# EAGLE board PCB v59 (EAGLE 9.7.0)
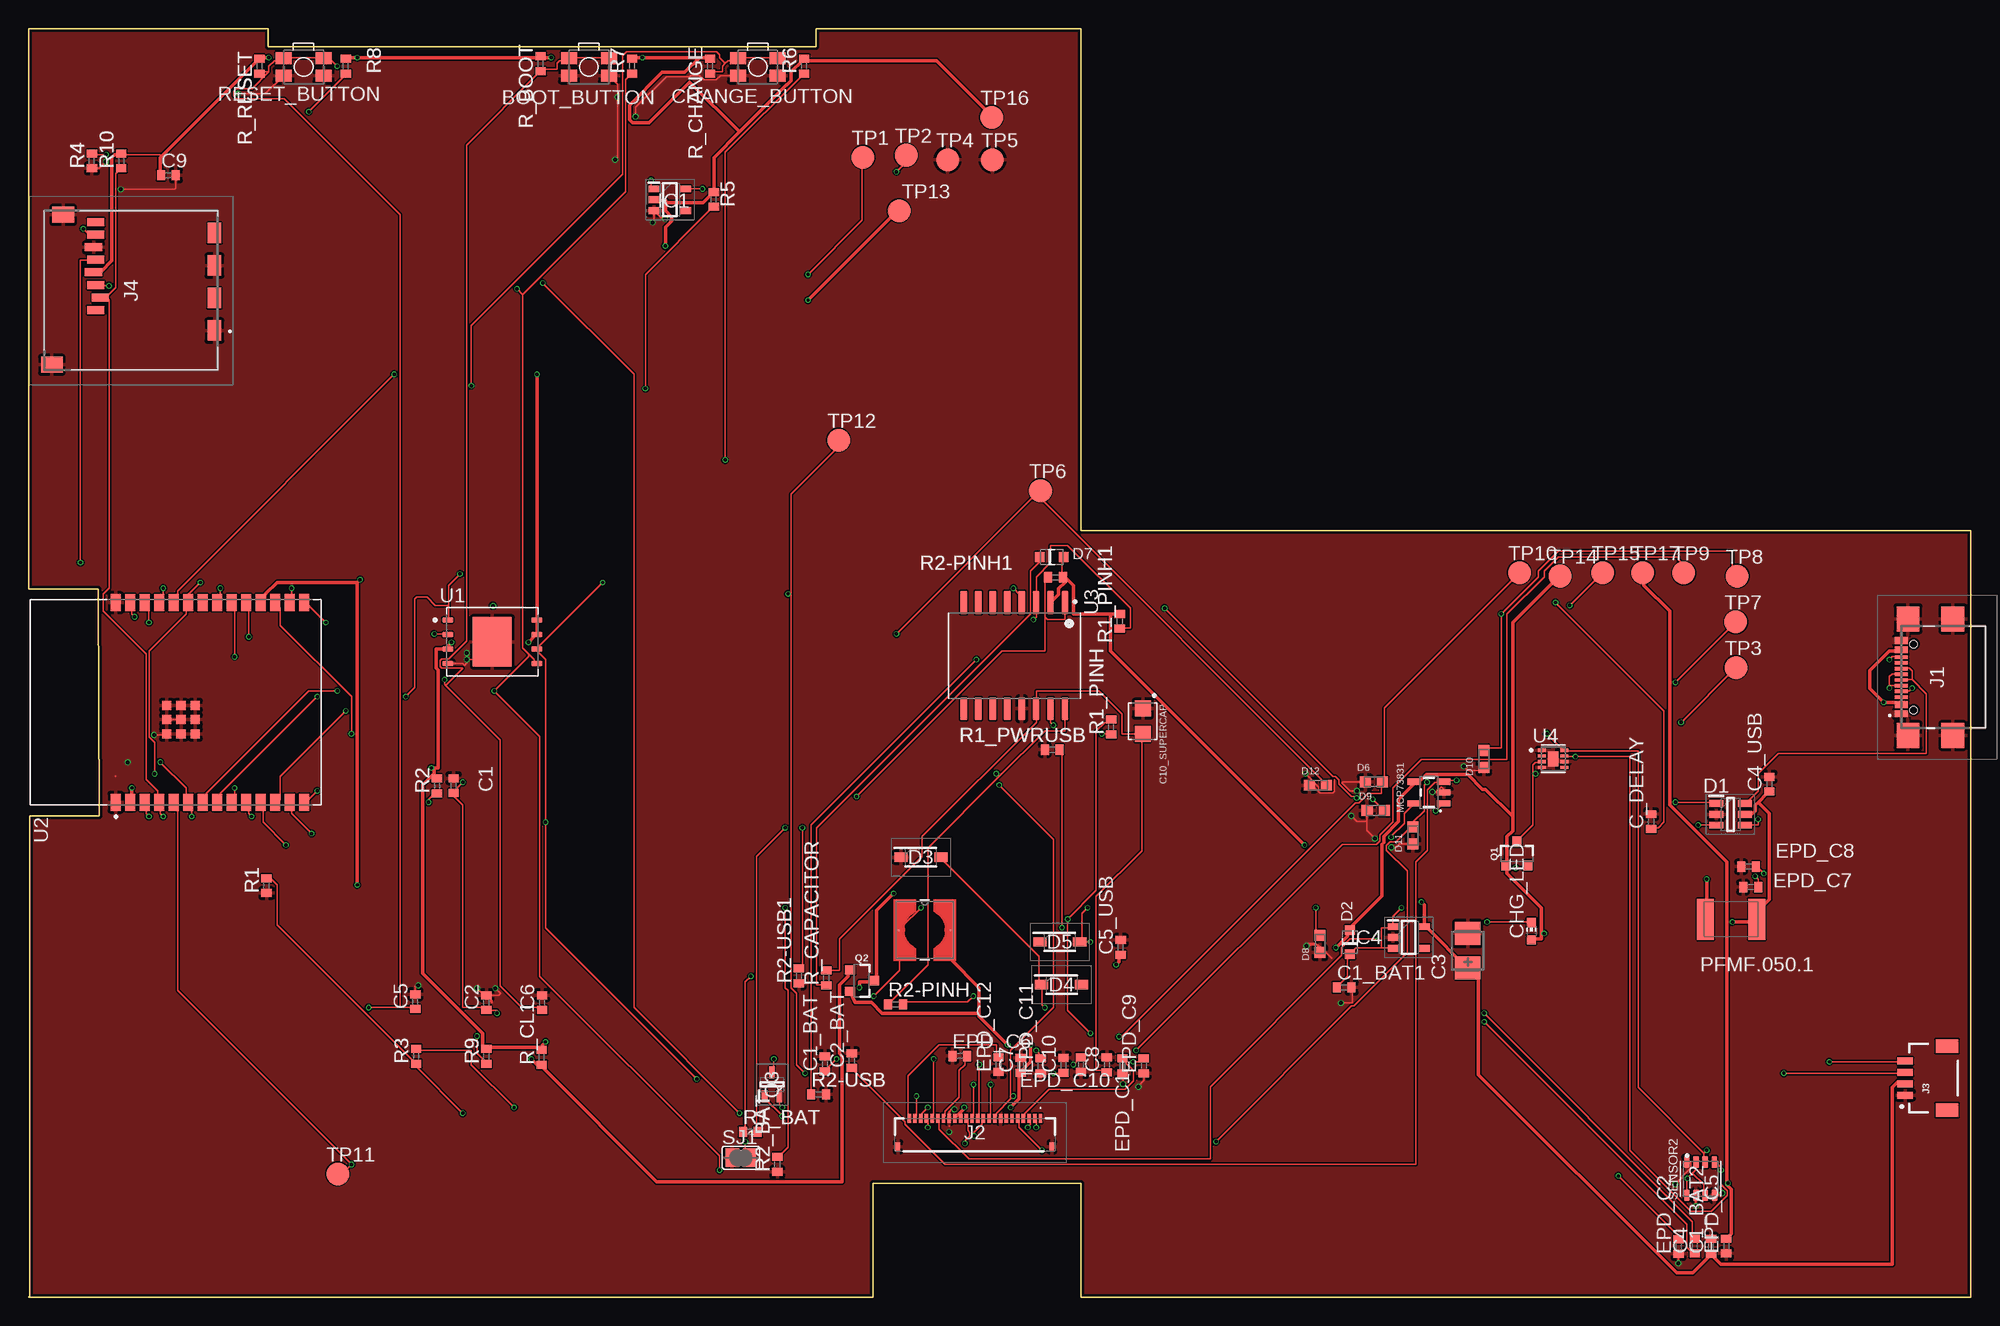
[diagram p0: board, top side]
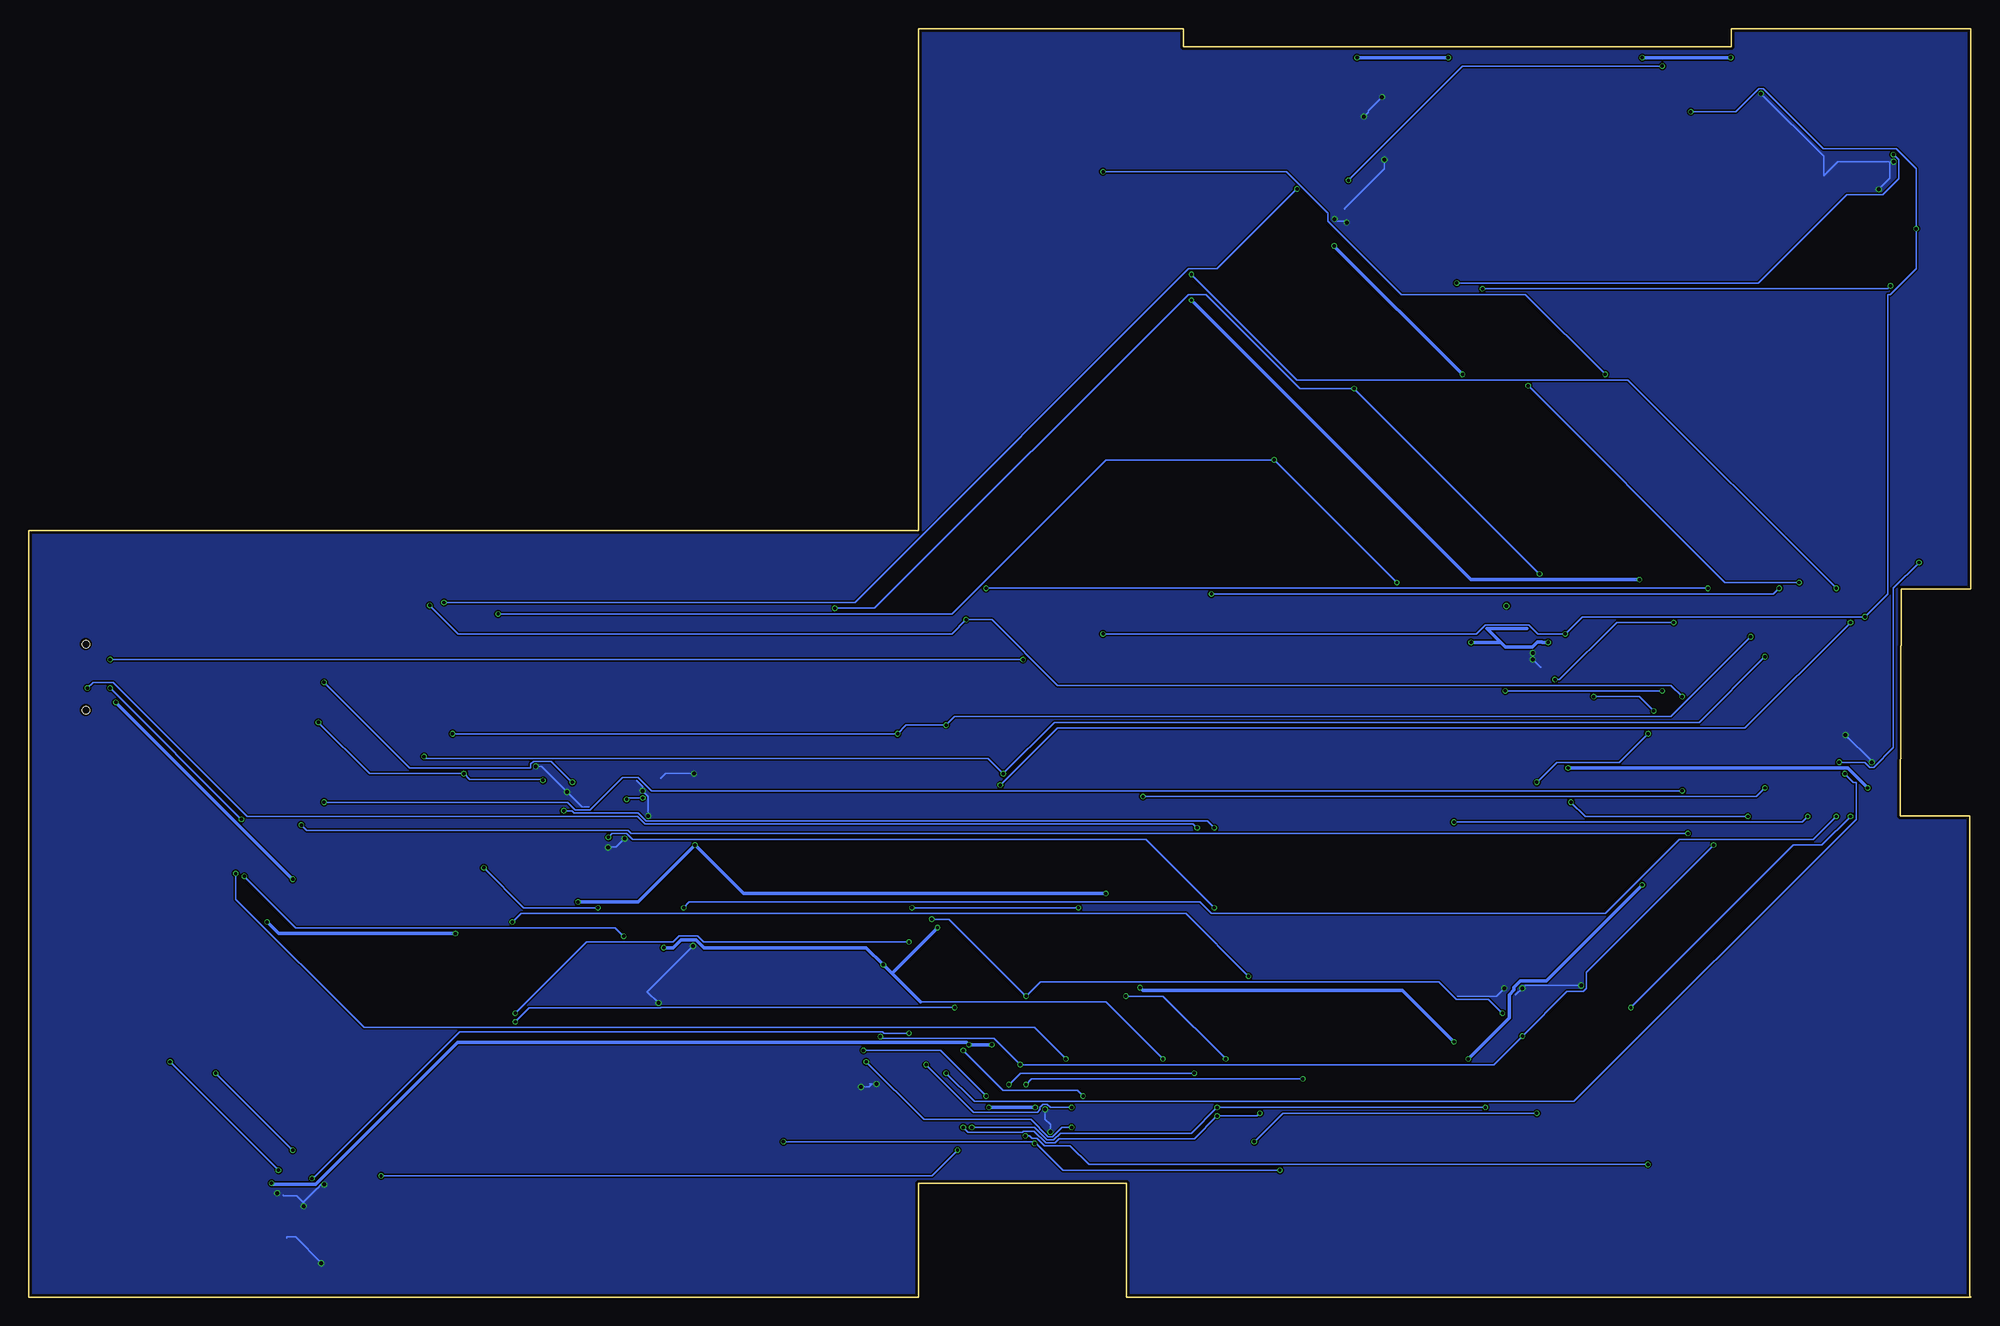
[diagram p1: board, bottom side, seen from below]

Size 170.2 x 111.2 mm. Coordinates in mm from the lower left corner, seen from the top.
Outline: 92.2,111.2 92.2,67.2 170.2,67.2 170.2,0 92.2,0 92.2,10 74,10 74,0 0,0 0.1,0.1 0.1,42.2 6.2,42.2 6.1,62.1 0,62.1 0,111.2 21,111.2 21,109.6 69,109.6 69,111.2 92.2,111.2
Copper layers (1*16): Top 0.035mm / dielectric 1.6mm / Bottom 0.035mm
Design rules "jlcpcb-2layers.dru": minimum track width 5mil, minimum drill 0.3mm, track to track 5mil, track to pad 5mil, pad to pad 5mil, via to via 5mil, smd to smd 5mil, copper to edge 0.2mm, drill to drill 6mil, minimum pad ring 10mil, minimum via ring 3mil, stop-mask expansion 4mil, vias tented up to drill 0mil, thermal gap 10mil

## Footprints (pad centres in the part's own frame; a part is rotated, then mirrored left to right if it is on the bottom)
MYBUTTON = smd 1.4 x 1.05: 1 1.75,0.75; 2 -1.75,0.75; 3 -1.75,-0.75; 4 1.75,-0.75
ESP32_WROVER_EAGLE-LTSPICE_C0402 = smd 0.7 x 0.9: 1 -0.65,0; 2 0.65,0
RCL_CT3528 = smd 2 x 2.2: + -1.5,0; - 1.5,0
EAGLE-LTSPICE_C0402 = smd 0.7 x 0.9: 1 -0.65,0; 2 0.65,0
CAPCP3225X100N = smd 1.4 x 1.4: 1 -1.1,0; 2 1.1,0
ADAFRUIT_CHIP-LED0603 = smd 0.8 x 0.8: A 0,-0.75; C 0,0.75
SOT95P280X145-6N = smd 1.2 x 0.6: 1 -1.25,0.95; 2 -1.25,0; 3 -1.25,-0.95; 4 1.25,-0.95; 5 1.25,0; 6 1.25,0.95
ESP32_WROVER_AVX---SD0805S020S1R0_AVX_SD0805S020S1R0_0 = smd 0.8 x 0.9: 1 -1.05,0; 2 1.05,0
SOD3716X135N = smd 1.15 x 0.8: 1 -1.75,0; 2 1.75,0
DIOC1608X36N = smd 0.97 x 0.94: 1 -0.75,0; 2 0.75,0
SOT95P280X125-5N = smd 0.9 x 0.6: 1 -1.4,0.95; 2 -1.4,0; 3 -1.4,-0.95; 4 1.4,-0.95; 5 1.4,0.95
SOT95P280X120-5N = smd 0.9 x 0.6: 1 -1.4,0.95; 2 -1.4,0; 3 -1.4,-0.95; 4 1.4,-0.95; 5 1.4,0.95
SAMACSYS_PARTS_USB4110GFA = smd 0.3 x 1.15: A1 -3.35,3.678; A4 -2.55,3.678; A5 -1.25,3.678; A6 -0.25,3.678; A7 0.25,3.678; A8 1.25,3.678; A9 2.55,3.678; A12 3.35,3.678; B1 3.05,3.678; B4 2.25,3.678; B5 1.75,3.678; B6 0.75,3.678; B7 -0.75,3.678; B8 -1.75,3.678; B9 -2.25,3.678; B12 -3.05,3.678 | smd 2.18 x 2: MP1 -5.11,-0.827; MP2 5.11,-0.827; MP3 -5.11,3.103; MP4 5.11,3.103 | hole 0.65: -2.89,2.603; 2.89,2.603
FH34SRJ24S05SH99 = smd 0.3 x 0.8: 1 5.75,1.45; 2 5.25,1.45; 3 4.75,1.45; 4 4.25,1.45; 5 3.75,1.45; 6 3.25,1.45; 7 2.75,1.45; 8 2.25,1.45; 9 1.75,1.45; 10 1.25,1.45; 11 0.75,1.45; 12 0.25,1.45; 13 -0.25,1.45; 14 -0.75,1.45; 15 -1.25,1.45; 16 -1.75,1.45; 17 -2.25,1.45; 18 -2.75,1.45; 19 -3.25,1.45; 20 -3.75,1.45; 21 -4.25,1.45; 22 -4.75,1.45; 23 -5.25,1.45; 24 -5.75,1.45 | smd 0.4 x 0.8: MP1 6.75,-1.05; MP2 -6.75,-1.05
JST04_1MM_RA = smd 0.6 x 1.35: 1 -1.5,0; 2 -0.5,0; 3 0.5,0; 4 1.5,0 | smd 1.2 x 2: NC1 2.8,-3.675; NC2 -2.8,-3.675
112ATAARR03ATTEND = smd 1.8 x 1.2: G1 10.6,10.4; G2 4.9,10.4; S1 7.75,10.4; S2 2.05,10.4 | smd 1.4 x 1.9: G3 13.6,-3.85; G4 0.45,-2.85 | smd 0.7 x 1.5: P1 8.8,0; P2 7.7,0.4; P3 6.6,0; P4 5.5,-0.2; P5 4.4,0; P6 3.3,-0.2; P7 2.2,0; P8 1.1,0
IND_4828-WE-TPC_WRE = smd 0.127 x 0.127: 1 -2.286,0; 2 2.286,0
ESP32_WROVER_SPARKFUN-IC-POWER_SOT23-5 = smd 0.55 x 1.2: 1 -0.95,-1.3; 2 0,-1.3; 3 0.95,-1.3; 4 0.95,1.3; 5 -0.95,1.3
ESP32C6_VARISTOR_CT/CN1812 = smd 1.5 x 3.6: 1 -2.25,0; 2 2.25,0
ESP32_WROVER_SPARKFUN-DISCRETESEMI_SOT23-3 = smd 0.8 x 0.9: 1 -0.95,-1; 2 0.95,-1; 3 0,1.1
SOT65P210X110-3N = smd 1.05 x 0.5: 1 -1.05,0.65; 2 -1.05,-0.65; 3 1.05,0
ESP32_WROVER_EAGLE-LTSPICE_R0402 = smd 0.7 x 0.9: 1 -0.65,0; 2 0.65,0
ESP32_WROVER_BME680_PSON80P300X300X100-8N = smd 1.016 x 0.5: 1 1.458,1.2; 2 1.458,0.4; 3 1.458,-0.4; 4 1.458,-1.2; 5 -1.458,-1.22; 6 -1.458,-0.4; 7 -1.458,0.4; 8 -1.458,1.2
SJ = smd 1.168 x 1.6: 1 -0.762,0; 2 0.762,0
TP20R = smd 2 x 2: TP 0,0
SON127P600X800X80-9N = smd 0.94 x 0.44: 1 -3.895,1.905; 2 -3.895,0.635; 3 -3.895,-0.635; 4 -3.895,-1.905; 5 3.895,-1.905; 6 3.895,-0.635; 7 3.895,0.635; 8 3.895,1.905 | smd 3.4 x 4.3: 9 0,0
XCVR_ESP32-C6-WROOM-1-N8 = smd 1.5 x 0.9: 1 -8.75,5.26; 2 -8.75,3.99; 3 -8.75,2.72; 4 -8.75,1.45; 5 -8.75,0.18; 6 -8.75,-1.09; 7 -8.75,-2.36; 8 -8.75,-3.63; 9 -8.75,-4.9; 10 -8.75,-6.17; 11 -8.75,-7.44; 12 -8.75,-8.71; 13 -8.75,-9.98; 14 -8.75,-11.25; 15 8.75,-11.25; 16 8.75,-9.98; 17 8.75,-8.71; 18 8.75,-7.44; 19 8.75,-6.17; 20 8.75,-4.9; 21 8.75,-3.63; 22 8.75,-2.36; 23 8.75,-1.09; 24 8.75,0.18; 25 8.75,1.45; 26 8.75,2.72; 27 8.75,3.99; 28 8.75,5.26 | smd 0.8 x 0.8: 29_1 -2.755,0.79; 29_2 -1.505,0.79; 29_3 -0.255,0.79; 29_4 -2.755,-0.46; 29_5 -1.505,-0.46; 29_6 -0.255,-0.46; 29_7 -2.755,-1.71; 29_8 -1.505,-1.71; 29_9 -0.255,-1.71
SOIC127P1032X265-16N = smd 2.05 x 0.59: 1 -4.655,4.445; 2 -4.655,3.175; 3 -4.655,1.905; 4 -4.655,0.635; 5 -4.655,-0.635; 6 -4.655,-1.905; 7 -4.655,-3.175; 8 -4.655,-4.445; 9 4.655,-4.445; 10 4.655,-3.175; 11 4.655,-1.905; 12 4.655,-0.635; 13 4.655,0.635; 14 4.655,1.905; 15 4.655,3.175; 16 4.655,4.445
SON50P200X200X80-9N = smd 0.76 x 0.27: 1 -0.985,0.75; 2 -0.985,0.25; 3 -0.985,-0.25; 4 -0.985,-0.75; 5 0.985,-0.75; 6 0.985,-0.25; 7 0.985,0.25; 8 0.985,0.75 | smd 0.9 x 1.3: 9 0,0

## Placement (x,y rotation side)
BOOT_BUTTON  [MYBUTTON]  49.1,107.83 180 top
C1  100nF  [ESP32_WROVER_EAGLE-LTSPICE_C0402]  37.24,44.84 90 top
C1_BAT  4.7uF  [ESP32_WROVER_EAGLE-LTSPICE_C0402]  69.78,20.46 90 top
C1_BAT1  4.7uF  [ESP32_WROVER_EAGLE-LTSPICE_C0402]  115.28,27.18 0 top
C1_BAT2  4.7uF  [ESP32_WROVER_EAGLE-LTSPICE_C0402]  147.42,4.48 90 top
C2  100nF  [ESP32_WROVER_EAGLE-LTSPICE_C0402]  40.12,25.84 90 top
C2_BAT  4.7uF  [ESP32_WROVER_EAGLE-LTSPICE_C0402]  72.14,20.76 90 top
C3  100uF TANT  [RCL_CT3528]  126.1,30.39 90 top
C4  4.7uF/25V  [ESP32_WROVER_EAGLE-LTSPICE_C0402]  146.01,4.5 90 top
C4_USB  100nF  [EAGLE-LTSPICE_C0402]  152.53,44.98 90 top
C5  1uF  [ESP32_WROVER_EAGLE-LTSPICE_C0402]  33.89,25.92 90 top
C5_USB  4.7uF  [EAGLE-LTSPICE_C0402]  95.69,30.68 90 top
C6  100nF  [ESP32_WROVER_EAGLE-LTSPICE_C0402]  45,25.84 90 top
C7  10uF  [ESP32_WROVER_EAGLE-LTSPICE_C0402]  86.94,20.34 90 top
C8  100nF  [ESP32_WROVER_EAGLE-LTSPICE_C0402]  94.48,20.39 90 top
C9  100nF  [EAGLE-LTSPICE_C0402]  12.26,98.34 0 top
C10  100nF  [ESP32_WROVER_EAGLE-LTSPICE_C0402]  90.69,20.34 90 top
C10_SUPERCAP  CPH3225A  [CAPCP3225X100N]  97.64,50.5 270 top
C_DELAY  100nF  [ESP32_WROVER_EAGLE-LTSPICE_C0402]  142.17,41.7 90 top
CHANGE_BUTTON  [MYBUTTON]  63.9,107.83 180 top
CHG_LED  [ADAFRUIT_CHIP-LED0603]  131.68,32.1 0 top
D1  USBLC6-2SC6Y  [SOT95P280X145-6N]  149.13,42.33 0 top
D2  ESP32_WROVER_AVX---SD0805S020S1R0_AVX_SD0805S020S1R0_0_0AVX_SD0805S020S1R0_0_0  [ESP32_WROVER_AVX---SD0805S020S1R0_AVX_SD0805S020S1R0_0]  115.79,31.14 90 top
D3  MBR0530  [SOD3716X135N]  78.19,38.58 0 top
D4  MBR0530  [SOD3716X135N]  90.52,27.41 0 top
D5  MBR0530  [SOD3716X135N]  90.36,31.16 0 top
D6  PGB1010603MR  [DIOC1608X36N]  117.88,45.18 0 top
D7  ESP32_WROVER_AVX---SD0805S020S1R0_AVX_SD0805S020S1R0_0_0AVX_SD0805S020S1R0_0_0  [ESP32_WROVER_AVX---SD0805S020S1R0_AVX_SD0805S020S1R0_0]  89.66,64.89 0 top
D8  PGB1010603MR  [DIOC1608X36N]  113.16,30.98 90 top
D9  PGB1010603MR  [DIOC1608X36N]  118.04,42.68 0 top
D10  PGB1010603MR  [DIOC1608X36N]  127.52,47.18 90 top
D11  PGB1010603MR  [DIOC1608X36N]  121.3,40.48 90 top
D12  PGB1010603MR  [DIOC1608X36N]  112.98,44.88 0 top
EPD_C1  1uF/50V  [ESP32_WROVER_EAGLE-LTSPICE_C0402]  95.85,20.31 90 top
EPD_C2  1uF/50V  [ESP32_WROVER_EAGLE-LTSPICE_C0402]  144.58,4.46 90 top
EPD_C5  0.1uF/50V  [ESP32_WROVER_EAGLE-LTSPICE_C0402]  148.75,4.5 90 top
EPD_C6  1uF/50V  [ESP32_WROVER_EAGLE-LTSPICE_C0402]  81.59,21.16 0 top
EPD_C7  1uF/50V  [ESP32_WROVER_EAGLE-LTSPICE_C0402]  150.9,35.96 0 top
EPD_C8  1uF/50V  [ESP32_WROVER_EAGLE-LTSPICE_C0402]  150.71,37.76 0 top
EPD_C9  1uF/50V  [ESP32_WROVER_EAGLE-LTSPICE_C0402]  97.72,20.31 90 top
EPD_C10  1uF/50V  [ESP32_WROVER_EAGLE-LTSPICE_C0402]  92.21,20.4 90 top
EPD_C11  1uF/50V  [ESP32_WROVER_EAGLE-LTSPICE_C0402]  88.69,20.29 90 top
EPD_C12  1uF/50V  [ESP32_WROVER_EAGLE-LTSPICE_C0402]  85,20.41 90 top
IC1  BD5229G-TR  [SOT95P280X125-5N]  56.2,96.2 0 top
IC4  XC6220A331MR-G  [SOT95P280X120-5N]  120.94,31.55 0 top
J1  SAMACSYS_PARTS_USB4110-GF-A  [SAMACSYS_PARTS_USB4110GFA]  167.78,54.36 90 top
J2  FH34SRJ-24S-0.5SH_99_  [FH34SRJ24S05SH99]  82.92,14.25 0 top
J3  QWIIC_RIGHT_ANGLE  [JST04_1MM_RA]  164.43,19.22 90 top
J4  112A-TAAR-R03_ATTEND  [112ATAARR03ATTEND]  5.89,95.33 270 top
L1  744043680IND_4828-WE-TPC_WRE  [IND_4828-WE-TPC_WRE]  78.53,32.2 0 top
MCP73831  ESP32_WROVER_SPARKFUN-IC-POWER_MCP73831  [ESP32_WROVER_SPARKFUN-IC-POWER_SOT23-5]  122.7,44.25 90 top
PFMF.050.1  ESP32C6_VARISTORCN1812  [ESP32C6_VARISTOR_CT/CN1812]  149.18,33.14 0 top
Q1  20V/4.2A/52mΩ/1.4W  [ESP32_WROVER_SPARKFUN-DISCRETESEMI_SOT23-3]  130.41,38.86 0 top
Q2  20V/4.2A/52mΩ/1.4W  [ESP32_WROVER_SPARKFUN-DISCRETESEMI_SOT23-3]  72.98,27.76 270 top
Q3  SI1308EDL-T1-GE3  [SOT65P210X110-3N]  65.14,18.66 90 top
R1  [ESP32_WROVER_EAGLE-LTSPICE_R0402]  20.85,36.08 90 top
R1_BAT  200  [ESP32_WROVER_EAGLE-LTSPICE_R0402]  63.25,14.51 0 top
R1_PINH  10K  [ESP32_WROVER_EAGLE-LTSPICE_R0402]  94.86,49.98 90 top
R1_PINH1  10K  [ESP32_WROVER_EAGLE-LTSPICE_R0402]  95.61,59.25 90 top
R1_PWRUSB  100k  [ESP32_WROVER_EAGLE-LTSPICE_R0402]  89.7,48 0 top
R2  [ESP32_WROVER_EAGLE-LTSPICE_R0402]  35.79,44.83 90 top
R2-PINH  10K  [ESP32_WROVER_EAGLE-LTSPICE_R0402]  75.97,25.68 0 top
R2-PINH1  10K  [ESP32_WROVER_EAGLE-LTSPICE_R0402]  89.98,63.1 0 top
R2-USB  5k1  [ESP32_WROVER_EAGLE-LTSPICE_R0402]  69.23,17.79 0 top
R2-USB1  5k1  [ESP32_WROVER_EAGLE-LTSPICE_R0402]  67.5,28.18 90 top
R2_BAT  2K  [ESP32_WROVER_EAGLE-LTSPICE_R0402]  65.61,11.66 90 top
R3  0.47  [ESP32_WROVER_EAGLE-LTSPICE_R0402]  33.96,21.14 90 top
R4  10K  [ESP32_WROVER_EAGLE-LTSPICE_R0402]  5.55,99.59 90 top
R5  10K  [ESP32_WROVER_EAGLE-LTSPICE_R0402]  60.04,96.22 90 top
R6  10K  [ESP32_WROVER_EAGLE-LTSPICE_R0402]  67.96,107.91 90 top
R7  10K  [ESP32_WROVER_EAGLE-LTSPICE_R0402]  52.88,107.91 90 top
R8  10K  [ESP32_WROVER_EAGLE-LTSPICE_R0402]  27.8,107.91 90 top
R9  10K  [ESP32_WROVER_EAGLE-LTSPICE_R0402]  40.12,21.12 90 top
R10  10K  [ESP32_WROVER_EAGLE-LTSPICE_R0402]  8.13,99.59 90 top
R_BOOT  10K  [ESP32_WROVER_EAGLE-LTSPICE_R0402]  44.86,108.11 90 top
R_CAPACITOR  15  [ESP32_WROVER_EAGLE-LTSPICE_R0402]  69.9,28 90 top
R_CHANGE  10K  [ESP32_WROVER_EAGLE-LTSPICE_R0402]  59.72,107.9 90 top
R_CL1  10K  [ESP32_WROVER_EAGLE-LTSPICE_R0402]  44.96,21.04 90 top
R_RESET  10K  [ESP32_WROVER_EAGLE-LTSPICE_R0402]  20.24,107.9 90 top
RESET_BUTTON  [MYBUTTON]  24.1,107.83 180 top
SENSOR2  BME688  [ESP32_WROVER_BME680_PSON80P300X300X100-8N]  146.51,10.4 90 top
SJ1  [SJ]  62.42,12.25 0 top
TP1  TPTP20R  [TP20R]  73.11,99.92 0 top
TP2  TPTP20R  [TP20R]  76.89,100.1 0 top
TP3  TPTP20R  [TP20R]  149.61,55.2 0 top
TP4  TPTP20R  [TP20R]  80.53,99.7 0 top
TP5  TPTP20R  [TP20R]  84.45,99.7 0 top
TP6  TPTP20R  [TP20R]  88.67,70.7 0 top
TP7  TPTP20R  [TP20R]  149.59,59.2 0 top
TP8  TPTP20R  [TP20R]  149.71,63.2 0 top
TP9  TPTP20R  [TP20R]  145.03,63.5 0 top
TP10  TPTP20R  [TP20R]  130.64,63.52 0 top
TP11  TPTP20R  [TP20R]  27.09,10.82 0 top
TP12  TPTP20R  [TP20R]  70.99,75.12 0 top
TP13  TPTP20R  [TP20R]  76.29,95.22 0 top
TP14  TPTP20R  [TP20R]  134.19,63.22 0 top
TP15  TPTP20R  [TP20R]  137.94,63.52 0 top
TP16  TPTP20R  [TP20R]  84.39,103.42 0 top
TP17  TPTP20R  [TP20R]  141.44,63.52 0 top
U1  W25Q512JVEIQ  [SON127P600X800X80-9N]  40.63,57.46 0 top
U2  ESP32-C6-WROOM-1-N8  [XCVR_ESP32-C6-WROOM-1-N8]  12.9,52.14 90 top
U3  DS3231SN#  [SOIC127P1032X265-16N]  86.39,56.25 270 top
U4  MAX17048G+T10  [SON50P200X200X80-9N]  133.59,47.2 0 top

## Library data of the parts
BOOT_BUTTON CHANGE_BUTTON CHG_LED PFMF.050.1 RESET_BUTTON SJ1 TP1-TP17 = DeskAssistant v19 v1
C1 C1_BAT C1_BAT1 C1_BAT2 C2 C2_BAT C4 C4_USB C5 C5_USB C6-C10 C_DELAY EPD_C1 EPD_C2 EPD_C5-EPD_C12 = DeskAssistant v19 v1; SPICEMODEL: NONE; SPICEPREFIX: C
C3 = DeskAssistant v19 v1; SPICEPREFIX: C
C10_SUPERCAP = DeskAssistant v19 v1; AVAILABILITY: Not in stock; CHECK_PRICES: https://www.snapeda.com/parts/CPH3225A/Seiko+Instruments/view-part/?ref=eda; DESCRIPTION: 11 mF (EDLC) Supercapacitor 3.3 V 1210 (3225 Metric) - -; MF: Seiko Instruments; MP: CPH3225A; PACKAGE: 1210 Seiko; PRICE: None; PURCHASE-URL: https://www.snapeda.com/api/url_track_click_mouser/?unipart_id=562593&manufacturer=Seiko Instruments&part_name=CPH3225A&search_term=None; SNAPEDA_LINK: https://www.snapeda.com/parts/CPH3225A/Seiko+Instruments/view-part/?ref=snap
D1 = DeskAssistant v19 v1; AVAILABILITY: In Stock; CHECK_PRICES: https://www.snapeda.com/parts/USBLC6-2SC6Y/STMicroelectronics/view-part/?ref=eda; DESCRIPTION: 17V Clamp 5A (8/20µs) Ipp Tvs Diode Surface Mount SOT-23-6; MF: STMicroelectronics; MP: USBLC6-2SC6Y; PACKAGE: SOT-23-6 STMicroelectronics; PRICE: None; SNAPEDA_LINK: https://www.snapeda.com/parts/USBLC6-2SC6Y/STMicroelectronics/view-part/?ref=snap
D2 D7 = DeskAssistant v19 v1; CENTROID_NOT_SPECIFIED: No; DATASHEET: http://datasheets.avx.com/schottky.pdf; DIGIKEY_DESCRIPTION: DIODE SCHOTTKY 20V 1A 0805; DIGIKEY_PART_NUMBER: 478-7800-1-ND; LEAD_FREE: yes; MF: AVX; MOUSER_PART_NUMBER: 581-SD0805S020S1R0; PACKAGE: 0805 (2012 metric); PREFIX: D; ROHS: yes; TEMPERATURE_RANGE_HIGH: +125°C; TEMPERATURE_RANGE_LOW: -55°C
D3-D5 = DeskAssistant v19 v1; AVAILABILITY: In Stock; CHECK_PRICES: https://www.snapeda.com/parts/MBR0530/Onsemi/view-part/?ref=eda; DESCRIPTION: Diode Schottky 30 V 500mA Surface Mount SOD-123; MF: ON Semiconductor; MP: MBR0530; PACKAGE: SOD-123-2 ON Semiconductor; PRICE: None; PURCHASE-URL: https://www.snapeda.com/api/url_track_click_mouser/?unipart_id=179458&manufacturer=ON Semiconductor&part_name=MBR0530&search_term=None; SNAPEDA_LINK: https://www.snapeda.com/parts/MBR0530/Onsemi/view-part/?ref=snap
D6 D8-D12 = DeskAssistant v19 v1; AVAILABILITY: In Stock; CHECK_PRICES: https://www.snapeda.com/parts/PGB1010603MR/Littelfuse/view-part/?ref=eda; DESCRIPTION: 150V (Typ) Clamp - Ipp Tvs Diode Surface Mount 0603 (1608 Metric); MF: Littelfuse Inc.; MP: PGB1010603MR; PACKAGE: 0603 Littelfuse Inc.; PRICE: None; PURCHASE-URL: https://www.snapeda.com/api/url_track_click_mouser/?unipart_id=5659453&manufacturer=Littelfuse Inc.&part_name=PGB1010603MR&search_term=None; SNAPEDA_LINK: https://www.snapeda.com/parts/PGB1010603MR/Littelfuse/view-part/?ref=snap
IC1 = DeskAssistant v19 v1; DESCRIPTION: Voltage Detector with Adjustable Delay Time: CMOS processes are utilized to develop high precision, low current consumption CMOS reset ICs that allow arbitrary setting of the delay time. The extensive lineup includes both Nch Open Drain and CMOS output types in a wide range of detection voltages (from 2.3V to 6.0V, in 0.1V steps), enabling selection of the ideal solution based on customer requirements. In addition, the entire series is of course both lead-free and RoHS-compliant.; HEIGHT: 1.25mm; MANUFACTURER_NAME: ROHM Semiconductor; MANUFACTURER_PART_NUMBER: BD5229G-TR; MOUSER_PART_NUMBER: 755-BD5229G-TR; MOUSER_PRICE-STOCK: https://www.mouser.co.uk/ProductDetail/ROHM-Semiconductor/BD5229G-TR?qs=4kLU8WoGk0vvnhrrYwdszw%3D%3D
IC4 = DeskAssistant v19 v1; DESCRIPTION: LDO Voltage Regulators; HEIGHT: 1.2mm; MANUFACTURER_NAME: Torex; MANUFACTURER_PART_NUMBER: XC6220A331MR-G; MOUSER_PART_NUMBER: 865-XC6220A331MR-G; MOUSER_PRICE-STOCK: https://www.mouser.co.uk/ProductDetail/Torex-Semiconductor/XC6220A331MR-G?qs=AsjdqWjXhJ8ZSWznL1J0gg%3D%3D
J1 = DeskAssistant v19 v1; DESCRIPTION: CONN USB 2.0 TYPE-C R/A SMT; HEIGHT: 3.26mm; MANUFACTURER_NAME: GCT (GLOBAL CONNECTOR TECHNOLOGY); MANUFACTURER_PART_NUMBER: USB4110-GF-A; MOUSER_PART_NUMBER: 640-USB4110-GF-A; MOUSER_PRICE-STOCK: https://www.mouser.co.uk/ProductDetail/GCT/USB4110-GF-A?qs=KUoIvG%2F9IlYiZvIXQjyJeA%3D%3D
J2 = DeskAssistant v19 v1; DESCRIPTION: 24 Position FFC, FPC Connector Contacts, Top and Bottom 0.020" (0.50mm) Surface Mount, Right Angle; HEIGHT: 1.1mm; MANUFACTURER_NAME: Hirose; MANUFACTURER_PART_NUMBER: FH34SRJ-24S-0.5SH(99); MOUSER_PART_NUMBER: 798-FH34SRJ24S05SH99; MOUSER_PRICE-STOCK: https://www.mouser.co.uk/ProductDetail/Hirose-Connector/FH34SRJ-24S-0.5SH99?qs=vcbW%252B4%252BSTIpKBl5ap9J8Fw%3D%3D
J3 = DeskAssistant v19 v1; PROD_ID: CONN-13694
J4 = DeskAssistant v19 v1; DESCRIPTION: Micro SD Card Socket, Push-Push Type, Top Mount, SMT, H=1.83mm, 10u; HEIGHT: 1.9mm; MANUFACTURER_NAME: ATTEND; MANUFACTURER_PART_NUMBER: 112A-TAAR-R03 ATTEND
L1 = DeskAssistant v19 v1; COPYRIGHT: Copyright (C) 2024 Ultra Librarian. All rights reserved.; MANUFACTURER_PART_NUMBER: 744043680; MFR_NAME: Wurth Electronics
MCP73831 = DeskAssistant v19 v1; PROD_ID: IC-09995
Q1 Q2 = DeskAssistant v19 v1; PROD_ID: TRAN-14388
Q3 = DeskAssistant v19 v1; AVAILABILITY: In Stock; CHECK_PRICES: https://www.snapeda.com/parts/SI1308EDL-T1-GE3/Vishay+Siliconix/view-part/?ref=eda; DESCRIPTION: Si1308EDL-T1-GE3 N-channel MOSFET Transistor, 1.5 A, 30 V, 3-Pin SC-70 | Siliconix / Vishay SI1308EDL-T1-GE3; MF: Vishay Siliconix; MP: SI1308EDL-T1-GE3; PACKAGE: SOT-323 Vishay Semiconductor; PRICE: None; PURCHASE-URL: https://www.snapeda.com/api/url_track_click_mouser/?unipart_id=274603&manufacturer=Vishay Siliconix&part_name=SI1308EDL-T1-GE3&search_term=None; SNAPEDA_LINK: https://www.snapeda.com/parts/SI1308EDL-T1-GE3/Vishay+Siliconix/view-part/?ref=snap
R1 R1_BAT R1_PINH R1_PINH1 R1_PWRUSB R2 R2-PINH R2-PINH1 R2-USB R2-USB1 R2_BAT R3-R10 R_BOOT R_CAPACITOR R_CHANGE R_CL1 R_RESET = DeskAssistant v19 v1; SPICEMODEL: NONE; SPICEPREFIX: R
SENSOR2 = DeskAssistant v19 v1; AVAILABILITY: Unavailable; DESCRIPTION: Integrated Environmental Unit; MF: Bosch Sensortec; MP: BME680; PACKAGE: LGA-8 Bosch Tools; PRICE: None
U1 = DeskAssistant v19 v1; AVAILABILITY: In Stock; CHECK_PRICES: https://www.snapeda.com/parts/W25Q512JVEIQ/Winbond+Electronics/view-part/?ref=eda; DESCRIPTION: FLASH - NOR Memory IC 512Mb (64M x 8) SPI - Quad I/O 133 MHz 8-WSON (8x6); MF: Winbond Electronics; MP: W25Q512JVEIQ; PACKAGE: Package; PRICE: None; SNAPEDA_LINK: https://www.snapeda.com/parts/W25Q512JVEIQ/Winbond+Electronics/view-part/?ref=snap
U2 = DeskAssistant v19 v1; AVAILABILITY: In Stock; CHECK_PRICES: https://www.snapeda.com/parts/ESP32-C6-WROOM-1-N8/Espressif+Systems/view-part/?ref=eda; DESCRIPTION: Multiprotocol Modules ESP32-C6 module, Wi-Fi 6 in 2.4 GHz band, Bluetooth 5, Zigbee 3.0 and Thread. ESP34-WROOM Compatible - ENGINEERING SAMPLE; MF: Espressif Systems; MP: ESP32-C6-WROOM-1-N8; PACKAGE: None; PRICE: None; SNAPEDA_LINK: https://www.snapeda.com/parts/ESP32-C6-WROOM-1-N8/Espressif+Systems/view-part/?ref=snap
U3 = DeskAssistant v19 v1; AVAILABILITY: In Stock; CHECK_PRICES: https://www.snapeda.com/parts/DS3231SN%23/Analog+Devices/view-part/?ref=eda; DESCRIPTION: Extremely Accurate I²C-Integrated RTC/TCXO/Crystal; MF: Analog Devices; MP: DS3231SN#; PACKAGE: SOIC-16 Maxim; PRICE: None; PURCHASE-URL: https://www.snapeda.com/api/url_track_click_mouser/?unipart_id=99048&manufacturer=Analog Devices&part_name=DS3231SN#&search_term=None; SNAPEDA_LINK: https://www.snapeda.com/parts/DS3231SN%23/Analog+Devices/view-part/?ref=snap
U4 = DeskAssistant v19 v1; AVAILABILITY: In Stock; CHECK_PRICES: https://www.snapeda.com/parts/MAX17048G+T10/Analog+Devices/view-part/?ref=eda; DESCRIPTION: 3µA 1-Cell/2-Cell Fuel Gauge with ModelGauge; MF: Analog Devices; MP: MAX17048G+T10; PACKAGE: TDFN-8 Maxim; PRICE: None; PURCHASE-URL: https://www.snapeda.com/api/url_track_click_mouser/?unipart_id=329239&manufacturer=Analog Devices&part_name=MAX17048G+T10&search_term=None; SNAPEDA_LINK: https://www.snapeda.com/parts/MAX17048G+T10/Analog+Devices/view-part/?ref=snap

## Nets
3V3: C1_BAT2.1 C3.+ C9.1 D7.2 IC1.2 IC4.5 J3.2 J4.P4 Q2.3 R1_PINH1.2 R2-PINH1.2 R2.2 R5.2 R6.2 R7.2 R8.2 R9.2 R10.2 R_BOOT.2 R_CHANGE.2 R_CL1.2 R_RESET.2 TP16.TP U1.3 U1.7 U1.8 U2.2 U3.2
32KHZ: R2-PINH1.1 U2.9 U3.1
DN: D1.4 J1.A7 J1.B7
DP: D1.6 J1.A6 J1.B6
EPD_3V3: C7.1 EPD_C5.2 J2.15 J2.16 L1.2 Q2.2 TP17.TP
EPD_3V3_C: Q2.1 R_CL1.1 TP13.TP U2.18
EPD_BUSY: J2.9 TP9.TP U2.26
EPD_CS: D6.2 J2.12 R9.1 TP10.TP U2.11
EPD_DC: J2.11 TP11.TP U2.5
EPD_RST: J2.10 TP12.TP U2.21
FLASH_CS: D9.2 R5.1 U1.1 U2.12
GDR: J2.2 Q3.1 R4.2
GND: BOOT_BUTTON.1 BOOT_BUTTON.2 C1.2 C1_BAT1.2 C1_BAT2.2 C1_BAT.2 C2.2 C2_BAT.2 C3.- C4_USB.2 C5.2 C5_USB.2 C6.2 C7.2 C8.2 C9.2 C10.2 C10_SUPERCAP.1 C_DELAY.2 CHANGE_BUTTON.1 CHANGE_BUTTON.2 D1.2 D3.1 D6.1 D8.1 D9.1 D10.1 D11.1 D12.1 EPD_C1.1 EPD_C2.1 EPD_C5.1 EPD_C6.1 EPD_C7.1 EPD_C8.1 EPD_C9.1 EPD_C10.1 EPD_C11.1 EPD_C12.1 IC1.3 IC4.2 J1.A1 J1.A12 J1.B1 J1.B12 J1.MP1 J1.MP2 J1.MP3 J1.MP4 J2.8 J2.17 J2.MP1 J2.MP2 J3.1 J4.G1 J4.G2 J4.G3 J4.G4 J4.P6 MCP73831.2 R1.1 R1_PWRUSB.1 R2-USB1.1 R2-USB.2 R2_BAT.1 R4.1 RESET_BUTTON.1 RESET_BUTTON.2 SENSOR2.1 SENSOR2.5 SENSOR2.7 SJ1.1 TP4.TP TP5.TP U1.4 U1.9 U2.1 U2.28 U2.29_1 U2.29_2 U2.29_3 U2.29_4 U2.29_5 U2.29_6 U2.29_7 U2.29_8 U2.29_9 U3.13 U4.1 U4.4 U4.6 U4.9
GPIOB: R2.1 U2.10
I2C_PW: C1.1 C2.1 R1_PINH.2 R2-PINH.2 SENSOR2.2 SENSOR2.6 SENSOR2.8 U2.17
INT_RTC: R1_PINH1.1 TP15.TP U2.8 U3.3
IO/BOOT: BOOT_BUTTON.3 BOOT_BUTTON.4 C6.1 R_BOOT.1 U2.15
IO/CHANGE: C10.1 CHANGE_BUTTON.3 CHANGE_BUTTON.4 R_CHANGE.1 U2.23
MISO: D12.2 J4.P7 R8.1 TP6.TP U1.2 U2.27
MOSI: D11.2 J2.14 J4.P3 R7.1 TP7.TP U1.5 U2.7
N$2: C1_BAT1.1 D2.1 IC4.1 IC4.3 Q1.2
N$3: J1.A5 R2-USB1.2
N$4: J1.B5 R2-USB.1
N$5: C4.1 D3.2 D4.1
N$7: EPD_C12.2 J2.24
N$8: CHG_LED.C R1_BAT.1
N$9: MCP73831.1 R1_BAT.2
N$10: MCP73831.5 R2_BAT.2
N$11: EPD_C11.2 J2.23
N$12: EPD_C10.2 J2.22
N$13: EPD_C9.2 J2.21
N$14: EPD_C8.2 J2.20
N$15: EPD_C7.2 J2.19
N$16: EPD_C6.2 J2.18
N$18: C_DELAY.1 IC1.5
N$24: EPD_C2.2 J2.5
N$25: D7.1 R_CAPACITOR.1
N$26: EPD_C1.2 J2.4
PREVGH: D5.1
PREVGL: D4.2
RESE: J2.3 Q3.2 R3.2
RESE': R1.2 R3.1 SJ1.2
RESET: C5.1 IC1.1 R_RESET.1 RESET_BUTTON.3 RESET_BUTTON.4 U2.3
RTC_RST: U2.16 U3.4
RX: TP2.TP U2.24
SCK: D10.2 J2.13 J4.P5 R6.1 TP8.TP U1.6 U2.6
SCL: J3.4 R2-PINH.1 SENSOR2.4 U2.20 U3.16 U4.7
SDA: J3.3 R1_PINH.1 SENSOR2.3 U2.19 U3.15 U4.8
SRC: C4.2 D5.2 L1.1 Q3.3
SS_SD: D8.2 J4.P2 R10.1 U2.4
TX: TP1.TP U2.25
USB_D+: D1.1 U2.14
USB_D-: D1.3 U2.13
VBAT: C2_BAT.1 MCP73831.3 Q1.3 TP3.TP U4.2 U4.3
VBUS: C1_BAT.1 C4_USB.1 C5_USB.1 CHG_LED.A D1.5 D2.2 MCP73831.4 PFMF.050.1.2 Q1.1 R1_PWRUSB.2 TP14.TP
VRTC: C8.1 C10_SUPERCAP.2 R_CAPACITOR.2 U3.14
VUSB: J1.A4 J1.A9 J1.B4 J1.B9 PFMF.050.1.1

## Tracks (layer width: path | path; a pad name or v marks a point on that pad's centre or on a via)
3V3  (via drill 0.3)
  Top 0.127: R2-PINH1.2 90.55,63.15 90.55,64.65 D7.2 | 90.8,63.15 R2-PINH1.2 | 90.8,62.65 90.8,62.9 R2-PINH1.2 | 122.55,32.4 IC4.5 122.3,32.65 | 126.05,28.9 C3.+ 126.3,28.65 | 147.55,3.65 C1_BAT2.1 147.3,3.65 | 164.3,18.9 J3.2 | 59.55,108.65 R_CHANGE.2 | 53.05,108.65 R7.2 | 54.8,96.15 IC1.2 | 67.8,108.4 R6.2 68.05,108.4 | 60.05,96.9 R5.2 | 84.3,103.65 TP16.TP | 27.8,108.65 R8.2 | 44.8,108.65 R_BOOT.2 45.05,108.65 | 11.55,99.9 11.55,100.15 8.3,100.15 R10.2 8.05,100.15 | 11.55,98.4 C9.1 | 20.05,108.4 R_RESET.2 20.3,108.65 | 5.8,89.9 J4.P4 | 40.3,21.9 R9.2 40.05,21.9 39.8,22.15 | 44.8,21.9 R_CL1.2 45.05,21.9 | 74.05,27.65 Q2.3 74.3,27.9 | 44.55,58.15 U1.7 44.3,57.9 | 44.55,59.15 U1.8 44.55,59.4 | 35.55,45.9 35.55,45.65 R2.2 | 36.98,57.33 v37.05,57.4 | 35.55,46.4 v35.3,46.4 | U2.2 9.05,43.4
  Top 0.152: U1.3 36.48,56.83
  Top 0.3: 94.8,59.9 91.55,59.9 91.55,62.4 90.8,63.15 | 94.8,59.9 R1_PINH1.2 | 126.05,28.9 122.55,32.4 | 147.55,3.65 148.3,2.9 163.3,2.9 163.3,18.4 163.8,18.9 164.3,18.9 | 126.3,28.65 127.05,27.9 127.05,19.53 144.42,2.16 145.81,2.16 147.3,3.65 | 94.8,59.9 94.8,56.65 v111.8,39.65 | v122.05,34.65 122.3,34.4 122.3,32.65 | 53.05,108.65 v53.8,108.65 58.8,108.65 | 58.8,108.65 59.55,108.65 | 54.8,96.15 55.8,96.15 55.8,95.95 | 67.8,108.4 66.8,107.4 66.8,106.62 66.47,106.28 66.43,106.28 62.3,102.15 | 62.3,102.15 60.05,99.9 60.05,96.9 | 84.3,103.65 79.55,108.4 68.05,108.4 | 44.8,108.65 v28.8,108.65 27.8,108.65 | 11.55,98.4 11.55,99.9 20.05,108.4 | 8.05,100.15 7.55,100.15 7.3,99.9 7.3,90.85 6.35,89.9 5.8,89.9 | 20.3,108.65 v21.05,108.65 | 45.05,108.65 v45.8,108.65 | 44.8,21.9 40.3,21.9 | 74.05,27.65 72.8,27.65 v72.8,27.15 | v45.3,22.4 45.05,22.15 45.05,21.9 | 44.55,59.15 44.55,58.15 | 35.55,46.4 35.55,45.9 34.55,44.9 34.55,28.4 39.8,23.15 39.8,22.15 | U1.3 35.73,56.83 35.73,55.15 35.9,54.98 35.9,46.4 v35.3,46.4 | v43.8,57.4 44.3,57.9 | 9.05,43.4 v9.05,44.65 | 44.55,59.4 v44.55,80.9 | v75.8,35.4 74.3,33.9 74.3,27.9 | 36.48,56.83 36.98,57.33 | 58.8,108.65 57.5,107.35 55.53,107.35 52.66,104.48 52.66,103.22 52.92,102.96 54.38,102.96 57.94,106.51 62.3,102.15 | v55.8,92.15 55.8,93.78 56.34,94.32 56.34,94.68 55.8,95.23 55.8,95.95 | 55.8,95.95 59.12,95.95 R5.2 | U3.2 90.26,61.6 90.26,62.11 90.8,62.65
  Bottom 0.127: 37.58,57.4 37.62,57.44
  Bottom 0.3: v122.05,34.65 116.8,34.65 v111.8,39.65 107.55,35.4 v75.8,35.4 | v21.05,108.65 v28.8,108.65 | v45.8,108.65 v53.8,108.65 | v72.8,27.15 72.55,26.9 49.8,26.9 v45.3,22.4 | v9.05,44.65 10.8,46.4 v35.3,46.4 | v44.55,80.9 v55.8,92.15 | v37.05,57.4 37.58,57.4 | 37.62,57.44 37.98,57.44 38.42,57 40.8,57 41.2,57.4 | 41.2,57.4 42.4,58.6 38.9,58.6 | 41.2,57.4 v43.8,57.4
32KHZ  (via drill 0.3)
  Top 0.127: 89.05,59.65 89.05,62.65 89.3,62.9 R2-PINH1.1 | 89.05,59.65 89.3,59.4 90.8,59.4 90.8,60.9 U3.1 | v18.05,44.65 18.05,43.65 U2.9 | v72.55,43.9 85.3,56.65 89.05,56.65 89.05,59.65
  Bottom 0.127: v18.05,44.65 18.8,43.9 v72.55,43.9
DN  (via drill 0.3)
  Top 0.127: 163.05,53.65 164.05,53.65 J1.B7 | 163.05,53.65 163.05,54.4 163.3,54.65 164.05,54.65 J1.A7 | v151.55,41.9 151.55,41.4 150.55,41.4 D1.4 | 163.05,53.65 v163.05,53.4
  Bottom 0.127: v163.05,53.4 v151.55,41.9
DP
  Top 0.127: 165.05,54.15 164.3,54.15 J1.A6 | 165.05,54.15 165.05,54.9 164.8,55.15 164.3,55.15 J1.B6 | 165.05,54.15 166.3,52.9 166.3,47.65 153.3,47.65 151.55,45.9 151.55,44.4 150.55,43.4 D1.6
EPD_3V3  (via drill 0.3)
  Top 0.127: J2.15 81.55,15.9 81.37,15.9 81.3,15.9 J2.16 | 80.8,29.65 80.8,32.15 L1.2 | 87.05,19.9 C7.1 86.8,19.65 | TP17.TP 141.55,63.4 | v148.91,10.01 148.8,9.9 148.8,9.88
  Top 0.3: 83.3,24.9 74.8,24.9 73.85,25.85 72.4,25.85 Q2.2 | 83.3,24.9 83.3,27.15 80.8,29.65 | 87.05,19.9 87.8,20.65 v87.8,22.15 | v85.8,22.15 83.3,24.65 83.3,24.9 | v86.05,16.65 86.8,17.4 86.8,19.65 | 148.8,9.9 148.8,38.15 143.8,43.15 143.8,60.15 141.55,62.4 141.55,63.4 | 148.8,9.88 149.2,9.49 149.2,5.6 EPD_C5.2 | v81.98,16.65 81.98,16.51 81.37,15.9
  Bottom 0.127: 88,22.35 v87.8,22.15 | 148.83,9.93 v148.91,10.01
  Bottom 0.3: v85.8,22.15 v87.8,22.15 | 88,22.35 132.6,22.35 145.02,9.93 148.83,9.93 | v86.05,16.65 v81.98,16.65
EPD_3V3_C  (via drill 0.3)
  Top 0.127: 20.8,61.65 20.8,61.15 20.55,60.9 U2.18 | 44.8,20.15 R_CL1.1 | 76.05,95.15 TP13.TP
  Top 0.3: R_CL1.1 45.05,20.15 55.05,10.15 71.3,10.15 71.3,21.15 71.05,21.4 71.05,27.4 71.8,28.15 71.8,28.65 Q2.1 | v28.8,36.15 28.8,62.65 | 44.8,20.15 v44.05,20.9 | v68.3,87.4 76.05,95.15 | 28.8,62.65 v29.05,62.9 | 20.8,61.65 20.8,61.67 21.78,62.65 28.8,62.65
  Bottom 0.3: v68.3,87.4 43.8,62.9 v29.05,62.9 | v44.05,20.9 40.47,24.48 40.47,26.51 40.04,26.94 40.04,27.18 39.48,27.74 37.21,27.74 v28.8,36.15
EPD_BUSY  (via drill 0.3)
  Top 0.127: 86.05,17.4 84.8,16.15 84.8,15.9 J2.9 | TP9.TP 144.8,63.65 144.8,64.4 144.55,64.65 144.55,64.9 134.05,64.9 132.8,63.65 132.8,63.15 129.55,59.9 129.55,47.15 122.05,47.15 119.55,44.65 119.55,41.68 118.41,40.53 118.41,40.03 118.08,39.71 115.11,39.71 v97.05,21.65 | v10.55,59.15 10.55,60.4 10.3,60.65 U2.26 | v85.05,44.9 89.8,40.15 89.8,25.4 86.05,21.65 86.05,17.4 | v86.3,17.65 86.05,17.4
  Bottom 0.127: v97.05,21.65 90.3,21.65 v86.3,17.65 | v10.55,59.15 19.8,49.9 80.05,49.9 v85.05,44.9
EPD_CS  (via drill 0.3)
  Top 0.127: v22.55,39.65 20.55,41.65 20.55,43.15 U2.11 | R9.1 40.05,20.65 39.3,21.4 v39.3,22.9 | v83.3,20.4 83.3,15.9 J2.12 | TP10.TP 130.55,63.4 118.8,51.65 118.8,45.4 D6.2 118.55,45.15 118.55,44.15 117.35,44.15 116.55,43.36 116.25,43.36 95.75,22.85 v95.55,22.85
  Bottom 0.127: v39.3,22.9 41.8,20.4 v83.3,20.4 85.59,22.69 95.39,22.69 v95.55,22.85 | v22.55,39.65 33.71,28.49 33.71,27.07 33.97,26.81 35.39,26.81 v39.3,22.9 | v39.3,22.9
EPD_DC  (via drill 0.3)
  Top 0.127: J2.11 83.55,15.65 83.55,15.15 82.86,14.46 v82.86,14.15 | TP11.TP 27.3,10.65 v28.3,11.65 13.05,26.9 13.05,42.9 12.8,43.15 U2.5
  Bottom 0.127: v28.3,11.65 77.3,11.65 | v82.86,14.15 82.47,14.15 82.31,13.98
  Bottom 0.152: 82.31,13.98 82.26,13.93 81.82,13.93 81.17,13.28 78.93,13.28 77.3,11.65
EPD_RST  (via drill 0.3)
  Top 0.127: v84.3,18.65 84.3,15.9 J2.10 | v68.05,19.65 67.3,20.4 67.3,26.65 66.8,27.15 66.8,61.65 | 66.8,61.65 66.8,70.4 70.8,74.4 70.8,74.9 TP12.TP | v16.8,62.15 16.8,61.15 16.55,60.9 U2.21 | 66.8,61.65 v66.55,61.65
  Bottom 0.127: v84.3,18.65 83.3,19.65 v68.05,19.65 | v16.8,62.15 17.3,61.65 v66.55,61.65
FLASH_CS  (via drill 0.3)
  Top 0.127: v54.05,79.65 54.05,89.65 59.8,95.4 R5.1 | 36.8,60.65 36.8,59.4 U1.1 | 36.8,60.65 36.8,62.4 v37.8,63.4 | v117.8,43.65 118.55,42.9 D9.2 | v27.8,51.4 22.05,45.65 22.05,43.65 21.8,43.4 U2.12 | 36.8,60.65 35.63,60.65 34.91,61.37 33.99,61.37 33.83,61.21 33.83,53.43 v33.05,52.65 | v99.55,60.4 114.28,45.67 114.53,45.67 114.83,45.36 114.83,44.99 115.92,43.9 116.25,43.9 v116.38,43.77
  Bottom 0.127: v99.55,60.4 96.05,60.4 68.55,87.9 67.05,87.9 58.8,79.65 v54.05,79.65 v37.8,63.4 | v27.8,51.4 29.05,52.65 v33.05,52.65 | v117.8,43.65 117.68,43.77 v116.38,43.77
GDR  (via drill 0.3)
  Top 0.127: v88.3,14.9 88.3,15.65 J2.2 | v66.05,15.9 64.55,17.4 Q3.1 | v6.8,100.15 5.55,100.15 R4.2 | v45.05,88.9 53.05,80.9 53.05,25.4 v62.3,16.15
  Bottom 0.127: v62.3,16.15 62.55,15.9 v66.05,15.9 68.05,13.9 79.93,13.9 80.28,13.55 81.06,13.55 82.08,14.57 83.03,14.57 83.11,14.48 87.88,14.48 v88.3,14.9 | v45.05,88.9 18.62,88.9 10.87,96.66 7.72,96.66 6.33,98.04 6.33,99.71 6.59,99.96 6.61,99.96 v6.8,100.15
GND  (via drill 0.35)
  Top 0.127: U2.29_5 13.3,50.65 12.3,50.65 U2.29_2
  Top 0.152: 80.67,15.03 80.7,15 | D8.1 113,30.39 113,30.8 112.76,31.04 112.04,31.04 111.9,30.9 | RESET_BUTTON.1 20.8,105.53 20.8,105.5 v18.4,105.5 | C9.2 12.91,97.21 12.8,97.1 v8.09,97.1 | SENSOR2.7 v146.11,8.01 v146.1,8 | SENSOR2.1 145.6,11.86 145.66,11.8 145.66,11.34 144.92,10.61 144.92,10.52 v144.3,9.9 | C1_BAT1.2 116,27.11 116,25.8 v115,25.8 | C5.2 33.89,27.29 34.05,27.45 v34.15,27.35 | v40.9,27.1 41.35,26.65 41.19,26.49 C2.2 40.6,26.01 40.6,25.8 v39.3,27.1 | U1.9 39.07,55.9 v38.4,55.9 38.4,55.6 38.2,55.4 38.05,55.56 U1.4 | CHANGE_BUTTON.1 60.64,107.08 60.25,106.7 59.19,106.7 58.8,107.08 58.01,107.08 57.92,107 55.9,107 53.19,104.29 v53.19,103.49 | v51.4,99.7 51.6,99.9 v51.6,105.2 51.6,106.33 BOOT_BUTTON.2 | 117.29,41.79 D9.1 | 117.29,41.79 117.2,41.7 116.4,41.7 v115.9,42.2 | D12.1 112.49,44.88 113.04,44.33 | 114.42,45.4 114.42,44.33 114.3,44.21 113.16,44.21 113.04,44.33 | 113.04,44.33 113.04,44.76 v111.9,45.9 | D6.1 115.18,45.18 115.1,45.1 115.8,44.4 v116.4,44.4 | MCP73831.2 124,44.52 123.8,44.72 123.38,44.3 v123,44.3 | D11.1 120.13,39.73 119.9,39.5 119.49,39.5 v119.42,39.43 | 117.29,41.79 117.29,40.91 117.96,40.24 v117.96,40.21 | v80.67,14.5 80.67,14.43 80.8,14.3 | 114.2,29.7 113,30.9 111.9,30.9 | SENSOR2.5 147.79,9 148.28,9 v148.41,9.14 | v54.7,94.2 54.8,94.3 IC1.3 55.49,94.56 55.72,94.56 v55.77,94.51 | 7.64,45.66 7.6,45.7 | U2.29_1 12.03,49.3 v11,49.3 | EPD_C1.1 95.9,19.61 v95.9,18.7 | EPD_C9.1 97.72,19.02 97.2,18.5 v97.25,18.45 | J2.17 80.67,16.27 80.7,16.3 80.7,15.73 J2.17 | J2.17 80.67,16.29 80.69,16.29 80.88,16.48 v81.13,16.48 | R4.1 6.19,98.94 v6.78,99.52 | EPD_C2.1 144.58,3.01 v144.56,2.99
  Top 0.152: 111.9,30.9 111.96,30.84 v111.96,30.81 | v125.75,46.55 126.13,46.17 127.26,46.17 D10.1
  Bottom 0.152: 7.1,99.52 11.68,99.52 12.9,98.3 12.9,100 v18.4,105.5 | v146.1,8 145.95,8.15 146.15,8.35 | 146.15,8.35 146.7,8.9 147.9,8.9 147.9,9 | 147.6,5.2 147.6,5.3 146.8,5.3 144.56,3.06 v144.56,2.99 | v115,25.8 116,26.8 111.99,30.81 v111.96,30.81 | v34.15,27.35 39.05,27.35 v39.3,27.1 39.9,26.5 | v40.9,27.1 41.6,26.4 45,26.4 | v51.4,99.7 51.4,98.9 54.9,95.4 54.85,95.35 | v38.4,55.9 37.7,55.2 | v51.6,105.2 52.8,104 52.8,103.87 v53.19,103.49 | v115.9,42.2 115.9,43.9 v116.4,44.4 116.4,44.8 116.9,45.3 | v111.9,45.9 114.4,45.9 114.8,45.5 | v125.75,46.55 125.25,46.55 v123,44.3 121.7,43 121.1,43 | v54.7,94.2 54.8,94.3 55.55,94.3 v55.77,94.51 | v11,49.3 8.7,47 v8.7,46.9 | v95.9,18.7 96.3,18.7 | 96.3,18.7 96.5,18.7 | v97.25,18.45 96.55,18.45 96.3,18.7 | v81.13,16.48 81.13,15.63 80.67,15.17 v80.67,14.5 | v8.09,97.1 7.1,98.09 7.1,99.52 | 7.1,99.52 v6.78,99.52 | v117.96,40.21 117.99,40.21 118.73,39.47 119.39,39.47 v119.42,39.43 | v144.3,9.9 144.55,9.9 144.87,9.58 144.92,9.58 146.15,8.35 | 148.6,9.1 148.56,9.14 v148.41,9.14
  other vias: 38.4,56.47
  pour Top: 73.86,10.17 73.88,10.18 92.32,10.18 92.34,10.17 92.36,10.14 92.38,10.12 92.38,0.18 170.02,0.18 170.02,67.02 92.08,67.02 92.06,67.04 92.04,67.06 92.02,67.09 92.02,111.02 69.18,111.02 69.18,109.49 69.16,109.46 69.14,109.44 69.12,109.42 20.88,109.42 20.86,109.44 20.84,109.46 20.82,109.49 20.82,111.02 0.18,111.02 0.18,62.28 6.32,62.28 6.34,62.27 6.36,62.24 6.38,62.22 6.38,42.09 6.36,42.06 6.34,42.04 6.32,42.02 0.28,42.02 0.28,0.18 73.82,0.18 73.82,10.12 73.84,10.14
  pour Bottom: 73.86,10.17 73.88,10.18 92.32,10.18 92.34,10.17 92.36,10.14 92.38,10.12 92.38,0.18 170.02,0.18 170.02,67.02 92.08,67.02 92.06,67.04 92.04,67.06 92.02,67.09 92.02,111.02 69.18,111.02 69.18,109.49 69.16,109.46 69.14,109.44 69.12,109.42 20.88,109.42 20.86,109.44 20.84,109.46 20.82,109.49 20.82,111.02 0.18,111.02 0.18,62.28 6.32,62.28 6.34,62.27 6.36,62.24 6.38,62.22 6.38,42.09 6.36,42.06 6.34,42.04 6.32,42.02 0.28,42.02 0.28,0.18 73.82,0.18 73.82,10.12 73.84,10.14
  pour Top: 69.18,109.37 69.13,109.35 20.87,109.35 20.82,109.37 20.77,109.42 20.75,109.47 20.75,110.85 0.25,110.85 0.25,67.25 91.95,67.25 91.95,110.95 69.25,110.95 69.25,109.47 69.23,109.42
  pour Top: 73.82,10.23 73.87,10.25 92.33,10.25 92.38,10.23 92.43,10.19 92.45,10.13 92.45,0.25 169.95,0.25 169.95,66.95 0.25,66.95 0.25,62.35 6.33,62.35 6.38,62.33 6.43,62.29 6.45,62.23 6.45,42.07 6.43,42.02 6.38,41.97 6.33,41.95 0.35,41.95 0.35,0.25 73.75,0.25 73.75,10.13 73.77,10.19
  pour Bottom: 69.28,109.37 69.23,109.35 20.87,109.35 20.82,109.37 20.77,109.42 20.75,109.47 20.75,110.95 0.25,110.95 0.25,67.25 91.95,67.25 91.95,110.95 69.25,110.95 69.25,109.64 69.28,109.63 69.33,109.59 69.35,109.53 69.35,109.47 69.33,109.42
  pour Bottom: 73.82,10.23 73.87,10.25 92.33,10.25 92.38,10.23 92.43,10.19 92.45,10.13 92.45,0.25 169.95,0.25 169.95,66.95 0.25,66.95 0.25,62.35 6.33,62.35 6.38,62.33 6.43,62.29 6.45,62.23 6.45,42.07 6.43,42.02 6.38,41.97 6.33,41.95 0.35,41.95 0.35,0.25 73.75,0.25 73.75,10.13 73.77,10.19
GPIOB  (via drill 0.3)
  Top 0.127: v19.55,42.15 19.3,42.4 19.3,43.15 U2.10 | R2.1 35.55,44.15 35.05,43.65 v35.05,43.4
  Bottom 0.127: v19.55,42.15 33.8,42.15 v35.05,43.4
I2C_PW  (via drill 0.3)
  Top 0.127: v38.05,45.15 37.3,44.4 C1.1 37.3,44.15 37.3,43.9 38.05,43.15 38.05,25.4 40.05,25.4 C2.1 40.3,25.15 41.05,25.15 v41.05,24.9 | U2.17 21.8,60.65 22.05,60.4 22.05,58.9 28.3,52.65 v28.3,49.4 | 145.3,10.4 145.3,9.15 SENSOR2.8 | 145.8,10.9 146.05,11.15 146.05,11.65 SENSOR2.2 | 145.8,10.9 145.3,10.4 | 145.8,10.9 146.8,9.9 146.8,9.15 SENSOR2.6 | R2-PINH.2 76.8,25.9 82.3,25.9 v82.8,26.4 | R1_PINH.2 94.8,50.4 94.3,50.4 93.55,49.65 93.55,35.65 v91.05,33.15 91.05,25.15 v93.05,23.15 | 145.3,10.4 145.32,10.4 v145.35,10.43
  Bottom 0.127: v38.05,45.15 36.3,46.9 30.8,46.9 v28.3,49.4 | v82.8,26.4 89.55,33.15 v91.05,33.15 | v82.8,26.4 81.55,27.65 46.63,27.65 45.11,26.13 42.28,26.13 v41.05,24.9 | v82.8,26.4 | v93.05,23.15 95.26,23.15 95.38,23.27 132.43,23.27 145.27,10.43 v145.35,10.43
INT_RTC  (via drill 0.3)
  Top 0.127: R1_PINH1.1 95.8,58.65 96.55,58.65 96.55,60.4 91.05,65.9 89.55,65.9 89.55,64.4 88.3,63.15 88.3,61.15 U3.3 88.3,59.65 v88.05,59.4 | v25.3,52.65 16.8,44.15 16.8,43.65 16.55,43.4 U2.8 | v135.05,60.65 137.8,63.4 TP15.TP
  Bottom 0.127: v25.3,52.65 26.3,53.65 80.05,53.65 85.8,59.4 v88.05,59.4 89.3,58.15 132.55,58.15 v135.05,60.65
IO/BOOT  (via drill 0.3)
  Top 0.127: BOOT_BUTTON.3 50.8,108.65 47.55,108.65 BOOT_BUTTON.4 47.3,108.4 46.55,108.4 46.3,108.15 46.3,107.65 45.05,107.65 R_BOOT.1 44.8,107.4 38.38,100.98 38.38,57.55 36.8,55.97 36.22,55.97 36.07,55.82 36.07,55.29 36.22,55.15 38.02,55.15 38.03,55.13 36.55,53.65 | v26.05,59.15 24.3,60.9 U2.15 | C6.1 44.8,25.4 43.22,25.4 41.34,27.28 41.34,48.86 36.55,53.65 | 36.55,53.65 36.45,53.75 v36.45,54.15
  Bottom 0.127: v26.05,59.15 31.05,59.15 36.05,54.15 v36.45,54.15
IO/CHANGE  (via drill 0.3)
  Top 0.127: 61.05,108.15 61.3,108.4 62.05,108.4 CHANGE_BUTTON.4 62.3,108.65 65.55,108.65 CHANGE_BUTTON.3 | 61.05,108.15 60.8,107.9 60.8,107.4 59.8,107.4 R_CHANGE.1 | v89.8,19.65 90.55,19.65 C10.1 | 61.05,108.15 60.55,108.65 60.55,108.9 60.3,109.15 52.4,109.15 52.06,108.81 52.06,98.41 38.8,85.15 v38.8,79.9 | v15.05,62.65 14.05,61.65 14.05,60.9 U2.23 13.8,60.65 13.8,59.9 10.56,56.66 10.56,49.12 11.05,48.63 v11.05,45.9
  Bottom 0.127: v38.8,79.9 21.55,62.65 v15.05,62.65 | v89.8,19.65 87.32,17.17 34.78,17.17 10.05,41.9 10.05,45.15 10.3,45.15 v11.05,45.9
MISO  (via drill 0.3)
  Top 0.127: D12.2 113.55,44.9 113.3,45.15 113.3,45.4 88.8,69.9 88.8,70.65 TP6.TP 88.55,70.65 v76.05,58.15 | v35.55,58.15 36.55,58.15 U1.2 | v9.3,59.65 9.05,59.9 9.05,60.65 U2.27 | v24.55,103.9 27.8,107.15 R8.1 | v4.8,93.65 5.3,93.15 5.8,93.15 J4.P7
  Bottom 0.127: v24.55,103.9 20.62,103.9 18.58,105.94 18.22,105.94 12.93,100.65 6.55,100.65 4.8,98.9 v4.8,93.65 4.8,90.15 7.05,87.9 7.3,87.9 7.3,61.65 v9.3,59.65 34.05,59.65 v35.55,58.15 37.97,58.15 38.76,58.94 42.54,58.94 43.33,58.15 v76.05,58.15
MOSI  (via drill 0.3)
  Top 0.127: 43.3,87.9 43.3,56.9 43.8,56.4 | 43.8,56.4 44.3,55.9 44.3,55.65 U1.5 | v27.05,53.15 24.55,53.15 15.55,44.15 15.55,43.65 15.3,43.4 U2.7 | 43.8,56.4 43.8,56.15 v40.8,53.15 44.8,49.15 44.8,28.15 60.55,12.4 v60.55,11.15 | v7.05,88.65 6.05,88.65 J4.P3 | 43.3,87.9 v42.8,88.4 | J2.14 82.3,15.65 82.3,14.63 82.44,14.48 82.44,14.12 82.05,13.73 v82.05,13.5 | v122.55,45.15 122.3,44.9 122.3,42.65 121.3,41.65 121.3,41.4 | 121.3,41.4 D11.2 | v104.05,13.65 115.93,25.53 116.11,25.53 120.8,30.22 120.8,37.38 118.98,39.2 118.98,39.61 119.27,39.91 119.81,39.91 121.3,41.4 | 43.3,87.9 52.32,96.92 52.32,106.7 R7.1 | TP7.TP v144.3,53.9
  Bottom 0.127: v40.8,53.15 v27.05,53.15 | v7.05,88.65 7.3,88.4 v42.8,88.4 | 82.05,13.65 v104.05,13.65 | v60.55,11.15 79.55,11.15 82.05,13.65 | v122.55,45.15 124.39,46.99 125.93,46.99 126.19,46.73 126.19,46.43 126.22,46.4 136.8,46.4 v144.3,53.9 | v82.05,13.5 82.05,13.65
N$2  (via drill 0.3)
  Top 0.127: C1_BAT1.1 114.8,27.4 115.55,28.15 115.55,29.9 D2.1 115.8,30.15 116.3,30.65 118.55,30.65 | 118.55,30.65 119.3,30.65 IC4.3 | 118.55,30.65 118.55,32.4 119.3,32.4 IC4.1 119.55,32.65 119.55,33.4 v120.3,34.15 | v130.3,37.65 131.3,37.65 Q1.2
  Bottom 0.127: v130.3,37.65 126.8,34.15 v120.3,34.15
N$3  (via drill 0.3)
  Top 0.127: v67.8,41.15 67.8,29.15 67.55,28.9 R2-USB1.2 | v165.05,53.4 164.8,53.15 164.3,53.15 J1.A5
  Bottom 0.127: v165.05,53.4 164.55,53.9 162.8,53.9 151.05,42.15 116.83,42.15 116.19,41.5 68.15,41.5 v67.8,41.15
N$4  (via drill 0.3)
  Top 0.127: v83.05,55.9 68.55,41.4 68.55,17.9 R2-USB.1 | v163.05,55.9 163.3,56.15 164.05,56.15 J1.B5
  Bottom 0.127: v163.05,55.9 v83.05,55.9
N$5  (via drill 0.3)
  Top 0.127: v89.05,25.4 88.8,25.65 88.8,27.4 D4.1 88.55,27.65 88.55,29.9 80.05,38.4 D3.2 | C4.1 145.8,3.9 145.3,4.4 145.3,6.4 v127.55,24.15
  Bottom 0.127: v89.05,25.4 114.77,25.4 114.82,25.36 126.34,25.36 v127.55,24.15
N$6  (via drill 0.35)
  other vias: 40.7,60.6
N$7
  Top 0.127: J2.24 77.05,15.9 77.05,19.4 79.8,22.15 84.8,22.15 84.8,21.15 EPD_C12.2
N$8  (via drill 0.3)
  Top 0.127: v127.8,32.9 131.55,32.9 CHG_LED.C | v63.3,28.15 62.8,27.65 62.8,14.65 R1_BAT.1
  Bottom 0.127: v127.8,32.9 127.05,33.65 68.8,33.65 v63.3,28.15
N$9  (via drill 0.3)
  Top 0.127: v66.3,41.15 63.8,38.65 63.8,14.65 R1_BAT.2 | v123.3,42.65 123.8,43.15 MCP73831.1
  Bottom 0.127: v123.3,42.65 122.59,42.65 122.42,42.48 116.8,42.48 116.08,41.76 66.91,41.76 v66.3,41.15
N$10  (via drill 0.3)
  Top 0.127: v66.3,34.15 66.3,27.15 66.55,26.9 66.55,13.15 65.8,12.4 R2_BAT.2 | MCP73831.5 121.3,43.15 120.55,42.4 120.55,41.55 119.39,40.39 v119.39,40.33
  Bottom 0.127: v66.3,34.15 72.3,40.15 117.28,40.15 117.78,40.65 119.06,40.65 v119.39,40.33
N$11  (via drill 0.3)
  Top 0.127: v77.8,17.65 77.8,15.9 J2.23 | EPD_C11.2 88.55,21.15 88.55,21.4 v88.3,21.65
  Bottom 0.127: v77.8,17.65 78.3,18.15 84.8,18.15 v88.3,21.65
N$12  (via drill 0.3)
  Top 0.127: v78.8,16.65 78.3,16.15 78.3,15.9 J2.22 | v91.55,20.4 92.05,20.9 EPD_C10.2
  Bottom 0.127: v91.55,20.4 87.38,16.23 81.81,16.23 81.57,16.48 81.57,16.66 81.31,16.92 80.94,16.92 80.67,16.65 v78.8,16.65
N$13  (via drill 0.3)
  Top 0.127: v78.8,14.9 78.8,15.65 J2.21 | v96.8,20.65 97.55,20.65 97.55,20.9 EPD_C9.2
  Bottom 0.127: v96.8,20.65 91.74,15.59 82.38,15.59 80.85,14.06 80.49,14.06 79.64,14.9 v78.8,14.9
N$14  (via drill 0.3)
  Top 0.127: v79.3,20.9 79.3,15.9 J2.20 | EPD_C8.2 151.44,37.76 v152.05,37.15
  Bottom 0.127: v79.3,20.9 82.05,23.65 140.8,23.65 152.05,34.9 v152.05,37.15
N$15  (via drill 0.3)
  Top 0.127: v118.05,31.65 118.05,31.4 115.8,31.4 115.05,30.65 115.05,29.97 103.55,18.47 103.55,12.15 82.39,12.15 79.8,14.75 79.8,15.65 J2.19 | v151.3,36.9 151.55,36.65 EPD_C7.2
  Bottom 0.127: v118.05,31.65 118.8,32.4 146.8,32.4 v151.3,36.9
N$16
  Top 0.127: J2.18 80.3,15.9 80.3,16.29 81.55,17.54 81.55,19.9 82.05,20.4 82.05,21.15 EPD_C6.2
N$18  (via drill 0.3)
  Top 0.127: v59.05,97.15 IC1.5 | v133.8,60.9 143.3,51.4 143.3,41.65 142.8,41.15 142.3,41.15 C_DELAY.1
  Bottom 0.127: v59.05,97.15 66.05,90.15 68.55,90.15 97.8,60.9 v133.8,60.9
N$24  (via drill 0.3)
  Top 0.127: v88.8,12.9 86.8,14.9 86.8,15.65 J2.5 | v139.3,10.65 144.55,5.4 144.55,5.15 EPD_C2.2
  Bottom 0.127: v88.8,12.9 91.05,10.65 v139.3,10.65
N$25
  Top 0.127: R_CAPACITOR.1 69.8,27.4 69.05,27.4 69.05,41.15 87.8,59.9 87.8,63.65 88.55,64.4 88.55,64.65 D7.1
N$26
  Top 0.127: J2.4 87.3,15.9 87.3,16.15 89.41,18.26 96.08,18.26 96.8,18.98 96.8,19.9 96.05,20.65 96.05,20.9 EPD_C1.2
RESE  (via drill 0.3)
  Top 0.127: v87.55,14.9 87.8,15.15 87.8,15.65 J2.3 | v66.05,16.65 65.8,16.9 65.8,17.4 Q3.2 | v42.55,16.65 38.8,20.4 38.8,21.65 34.05,21.65 R3.2
  Bottom 0.127: v42.55,16.65 v66.05,16.65 68.3,14.4 79.79,14.4 80.38,13.8 80.96,13.8 82.05,14.9 v87.55,14.9
RESE'  (via drill 0.3)
  Top 0.127: R1.2 21.05,36.9 21.8,36.15 21.8,32.65 R3.1 34.05,20.4 34.05,20.15 v38.05,16.15 | v62.8,13.65 62.8,12.65 63.05,12.4 SJ1.2
  Bottom 0.127: v62.8,13.65 60.3,16.15 v38.05,16.15
RESET  (via drill 0.3)
  Top 0.127: v29.8,25.4 32.55,25.4 | 32.55,25.4 33.8,25.4 C5.1 | v10.55,42.15 10.3,42.4 10.3,43.15 U2.3 | 21.05,107.4 20.3,107.4 R_RESET.1 | 21.05,107.4 21.05,107.9 21.55,108.4 22.3,108.4 RESET_BUTTON.4 22.55,108.65 25.8,108.65 RESET_BUTTON.3 26.05,108.4 26.55,108.4 v27.05,107.9 | IC1.1 54.55,97.4 v54.55,97.9 | 32.55,25.4 32.55,94.9 22.39,105.06 18.22,105.06 17.96,105.32 17.96,105.68 18.22,105.94 19.59,105.94 21.05,107.4
  Bottom 0.127: v29.8,25.4 15.55,39.65 13.05,39.65 v10.55,42.15 | v54.55,97.9 44.55,107.9 v27.05,107.9
RTC_RST  (via drill 0.3)
  Top 0.127: v86.3,62.15 86.8,61.65 86.8,61.15 U3.4 | v23.05,62.15 23.05,61.06 U2.16
  Bottom 0.127: v86.3,62.15 v23.05,62.15
RX  (via drill 0.3)
  Top 0.127: v32.05,80.9 13.05,61.9 13.05,61.15 12.8,60.9 U2.24 | v76.05,98.65 76.8,99.4 76.8,99.9 TP2.TP
  Bottom 0.127: v32.05,80.9 39.05,87.9 49.92,87.9 56.34,94.32 56.34,95.03 59.96,98.65 v76.05,98.65
SCK  (via drill 0.3)
  Top 0.127: D10.2 127.55,48.15 129.05,48.15 v129.05,59.9 132.3,63.15 132.3,63.65 134.05,65.4 149.3,65.4 149.3,63.65 149.55,63.4 TP8.TP | v82.8,18.65 82.8,15.9 J2.13 | v58.55,19.15 45.3,32.4 v45.3,41.65 45.3,55.9 44.55,56.65 U1.6 44.55,56.9 v50.3,62.65 | v14.3,42.15 14.3,42.9 14.05,43.15 U2.6 13.8,43.4 13.8,44.65 v11.55,46.9 | v4.55,64.4 4.55,90.9 5.8,90.9 J4.P5 | v61.05,73.4 61.05,100.35 R6.1
  Bottom 0.127: v82.8,18.65 82.3,19.15 v58.55,19.15 | v50.3,62.65 v61.05,73.4 75.8,73.4 89.3,59.9 v129.05,59.9 | v14.3,42.15 14.8,41.65 v45.3,41.65 | v4.55,64.4 6.8,62.15 6.8,48.18 8.52,46.46 8.88,46.46 9.33,46.9 v11.55,46.9
SCL  (via drill 0.3)
  Top 0.127: v148.3,11.15 148.3,11.4 147.8,11.9 SENSOR2.4 | U4.7 134.8,47.4 v135.55,47.4 140.3,47.4 140.3,12.9 145.64,7.56 147.46,7.56 148.86,8.96 148.86,9.35 148.3,9.9 v148.3,11.15 | v157.8,20.65 164.3,20.65 J3.4 | 85.05,45.65 89.05,49.65 90.8,49.65 90.8,51.4 U3.16 | 85.05,45.65 78.8,39.4 78.8,29.15 75.55,25.9 R2-PINH.1 | v18.05,56.15 18.05,60.4 17.8,60.65 U2.20 | 85.05,45.65 v84.8,45.9 | v148.3,11.15
  Bottom 0.127: v157.8,20.65 v148.3,11.15 | v18.05,56.15 23.8,50.4 80.3,50.4 v84.8,45.9 86.15,47.25 135.4,47.25 v135.55,47.4
SDA  (via drill 0.3)
  Top 0.127: 146.8,12.65 141.05,18.4 141.05,47.9 134.8,47.9 U4.8 134.55,47.9 v133.05,49.4 | 146.8,12.65 146.8,11.9 SENSOR2.3 | v153.8,19.65 164.3,19.65 J3.3 | 146.8,12.65 v147.05,12.9 | v94.05,49.4 94.8,49.4 R1_PINH.1 | v89.8,50.15 89.55,50.4 89.55,51.4 U3.15 | v19.3,57.9 19.3,60.65 U2.19
  Bottom 0.127: v147.05,12.9 v153.8,19.65 | v19.3,57.9 26.3,50.9 89.05,50.9 v89.8,50.15 93.3,50.15 v94.05,49.4 v133.05,49.4
SRC  (via drill 0.3)
  Top 0.127: v65.3,20.9 65.3,19.9 Q3.3 | v74.05,26.4 76.3,28.65 76.3,32.15 | v93.05,31.15 92.3,31.15 D5.2 92.3,31.4 92.3,33.65 v92.8,34.15 | C4.2 145.8,5.15 145.8,6.65 v127.55,24.9 | 76.3,32.15 76.55,32.4 76.55,32.5 v78.2,34.15 | 76.3,32.15 L1.1
  Bottom 0.127: v65.3,20.9 70.8,26.4 v74.05,26.4 | v92.8,34.15 v78.2,34.15 | v127.55,24.9 121.3,31.15 113.71,31.15 113.18,31.68 111.58,31.68 111.04,31.15 v93.05,31.15
SS_SD  (via drill 0.3)
  Top 0.127: 6.8,87.65 6.3,87.65 J4.P2 6.8,87.65 | R10.1 8.05,98.9 7.65,98.5 7.65,88.5 6.8,87.65 | v112.8,34.15 112.8,32.15 113.05,31.9 D8.2 | v11.8,42.15 11.55,42.4 11.55,43.15 U2.4 11.3,43.4 11.3,44.4 10.3,45.4 10.3,56.4 6.55,60.15 6.55,61.65 7.05,62.15 7.05,87.4 6.8,87.65
  Bottom 0.127: v112.8,34.15 112.3,34.65 67.55,34.65 66.55,33.65 32.05,33.65 25.55,40.15 13.8,40.15 v11.8,42.15
TX  (via drill 0.3)
  Top 0.127: v11.8,62.15 11.8,61.15 11.55,60.9 U2.25 | v68.3,89.65 73.05,94.4 73.05,99.9 TP1.TP
  Bottom 0.127: v11.8,62.15 30.05,80.4 59.05,80.4 v68.3,89.65
USB_D+  (via drill 0.3)
  Top 0.127: v25.3,44.4 24.3,43.4 U2.14 | v144.3,43.4 147.76,43.4 D1.1
  Bottom 0.127: v25.3,44.4 115.62,44.4 116.79,45.57 118.16,45.57 120.99,42.73 122.31,42.73 122.98,43.4 v144.3,43.4
USB_D-  (via drill 0.3)
  Top 0.127: v146.3,41.4 147.8,41.4 D1.3 | v24.8,40.65 23.05,42.4 23.05,43.15 U2.13
  Bottom 0.127: v146.3,41.4 145.81,40.91 117.67,40.91 117.42,40.65 v24.8,40.65
VBAT  (via drill 0.3)
  Top 0.127: 132.55,46.9 132.55,47.4 U4.2 | 131.8,45.9 131.8,46.65 132.05,46.9 132.55,46.9 | 131.8,45.9 131.8,41.4 130.55,40.15 Q1.3 | 132.55,46.9 U4.3 | v144.8,50.4 149.55,55.15 TP3.TP | 131.8,45.9 v132.05,45.9 | C2_BAT.1 72.3,19.9 76.8,15.4 76.8,15.15 80.3,11.65 121.55,11.65 121.55,38.15 122.56,39.16 122.56,44.48 123.22,45.15 123.8,45.15 MCP73831.3 124.11,45.31 v125.13,45.31
  Bottom 0.127: v144.8,50.4 140.3,45.9 v132.05,45.9 131.55,45.4 125.22,45.4 v125.13,45.31
VBUS  (via drill 0.3)
  Top 0.127: C1_BAT.1 69.8,19.9 v70.8,20.9 | 95.55,29.9 C5_USB.1 | v90.55,32.4 90.55,47.9 R1_PWRUSB.2 | 121.3,44.9 121.3,45.15 MCP73831.4 121.55,45.4 122.05,45.4 | 115.8,32.4 D2.2 115.55,32.15 | 152.3,44.15 C4_USB.1 | 150.55,42.4 D1.5 | 151.55,33.15 PFMF.050.1.2 151.3,32.9 | 131.8,31.4 CHG_LED.A | 129.55,37.65 Q1.1 129.55,37.9 | 134.05,63.15 TP14.TP | 132.55,31.9 v132.8,31.9 | 118.75,39.86 118.6,39.72
  Top 0.3: v95.3,29.15 95.55,29.4 95.55,29.9 | 121.3,44.9 120.05,43.65 120.05,41.7 118.75,40.39 118.75,39.86 | 151.55,43.4 151.3,43.15 151.3,42.65 151.05,42.4 150.55,42.4 | 151.55,43.4 152.3,44.15 | 151.55,43.4 152.55,42.4 152.55,34.9 151.55,33.9 151.55,33.15 | 131.8,31.4 132.55,31.4 132.55,31.9 132.55,34.15 129.55,37.15 129.55,37.65 | 134.05,63.15 130.05,59.15 130.05,42.15 | 130.05,42.15 130.05,40.9 129.55,40.4 129.55,37.9 | v114.55,30.65 115.55,31.65 115.55,32.15 | 130.05,42.15 127.67,44.53 127.39,44.53 126.11,45.82 122.47,45.82 122.05,45.4 | 115.8,32.4 118.6,35.2 118.6,39.72 | v149.3,32.9 151.3,32.9
  Bottom 0.127: 92.05,25.9 75.8,25.9 v70.8,20.9
  Bottom 0.3: 94.55,28.4 v95.3,29.15 96.8,30.65 111.02,30.65 111.72,31.34 113.03,31.34 113.73,30.65 v114.55,30.65 | 94.55,28.4 92.05,25.9 | 94.55,28.4 v90.55,32.4 | v132.8,31.9 148.3,31.9 v149.3,32.9
VRTC
  Top 0.127: 97.55,49.4 97.55,39.15 93.55,35.15 93.55,19.9 94.3,19.9 C8.1 | R_CAPACITOR.2 71.05,28.65 71.05,31.4 78.3,38.65 78.3,40.4 88.3,50.4 88.3,51.4 U3.14 88.3,51.65 88.3,53.15 93.8,53.15 95.8,51.15 95.8,49.4 97.55,49.4 | 97.55,49.4 C10_SUPERCAP.2
VUSB  (via drill 0.3)
  Top 0.127: J1.A4 164.05,51.9 164.05,52.15 J1.B9 | J1.A9 164.05,56.9 164.05,56.65 J1.B4 | 147.05,33.15 PFMF.050.1.1
  Top 0.3: 164.05,52.15 v162.55,52.15 161.35,53.35 161.35,54.95 163.05,56.65 164.05,56.65 | 147.05,33.15 v147.05,36.65
  Bottom 0.3: v147.05,36.65 v162.55,52.15